# Altium PCB piRack.PcbDoc
Units mil, origin at the board's own origin, x right, y up, seen from the top; angles counter-clockwise.
Board outline 2559.06 x 2224.41 mil, 2 copper layers (Top Layer, Bottom Layer), stack 64.8 mil thick; 40 components, 64 nets, 236 pads, 120 vias.
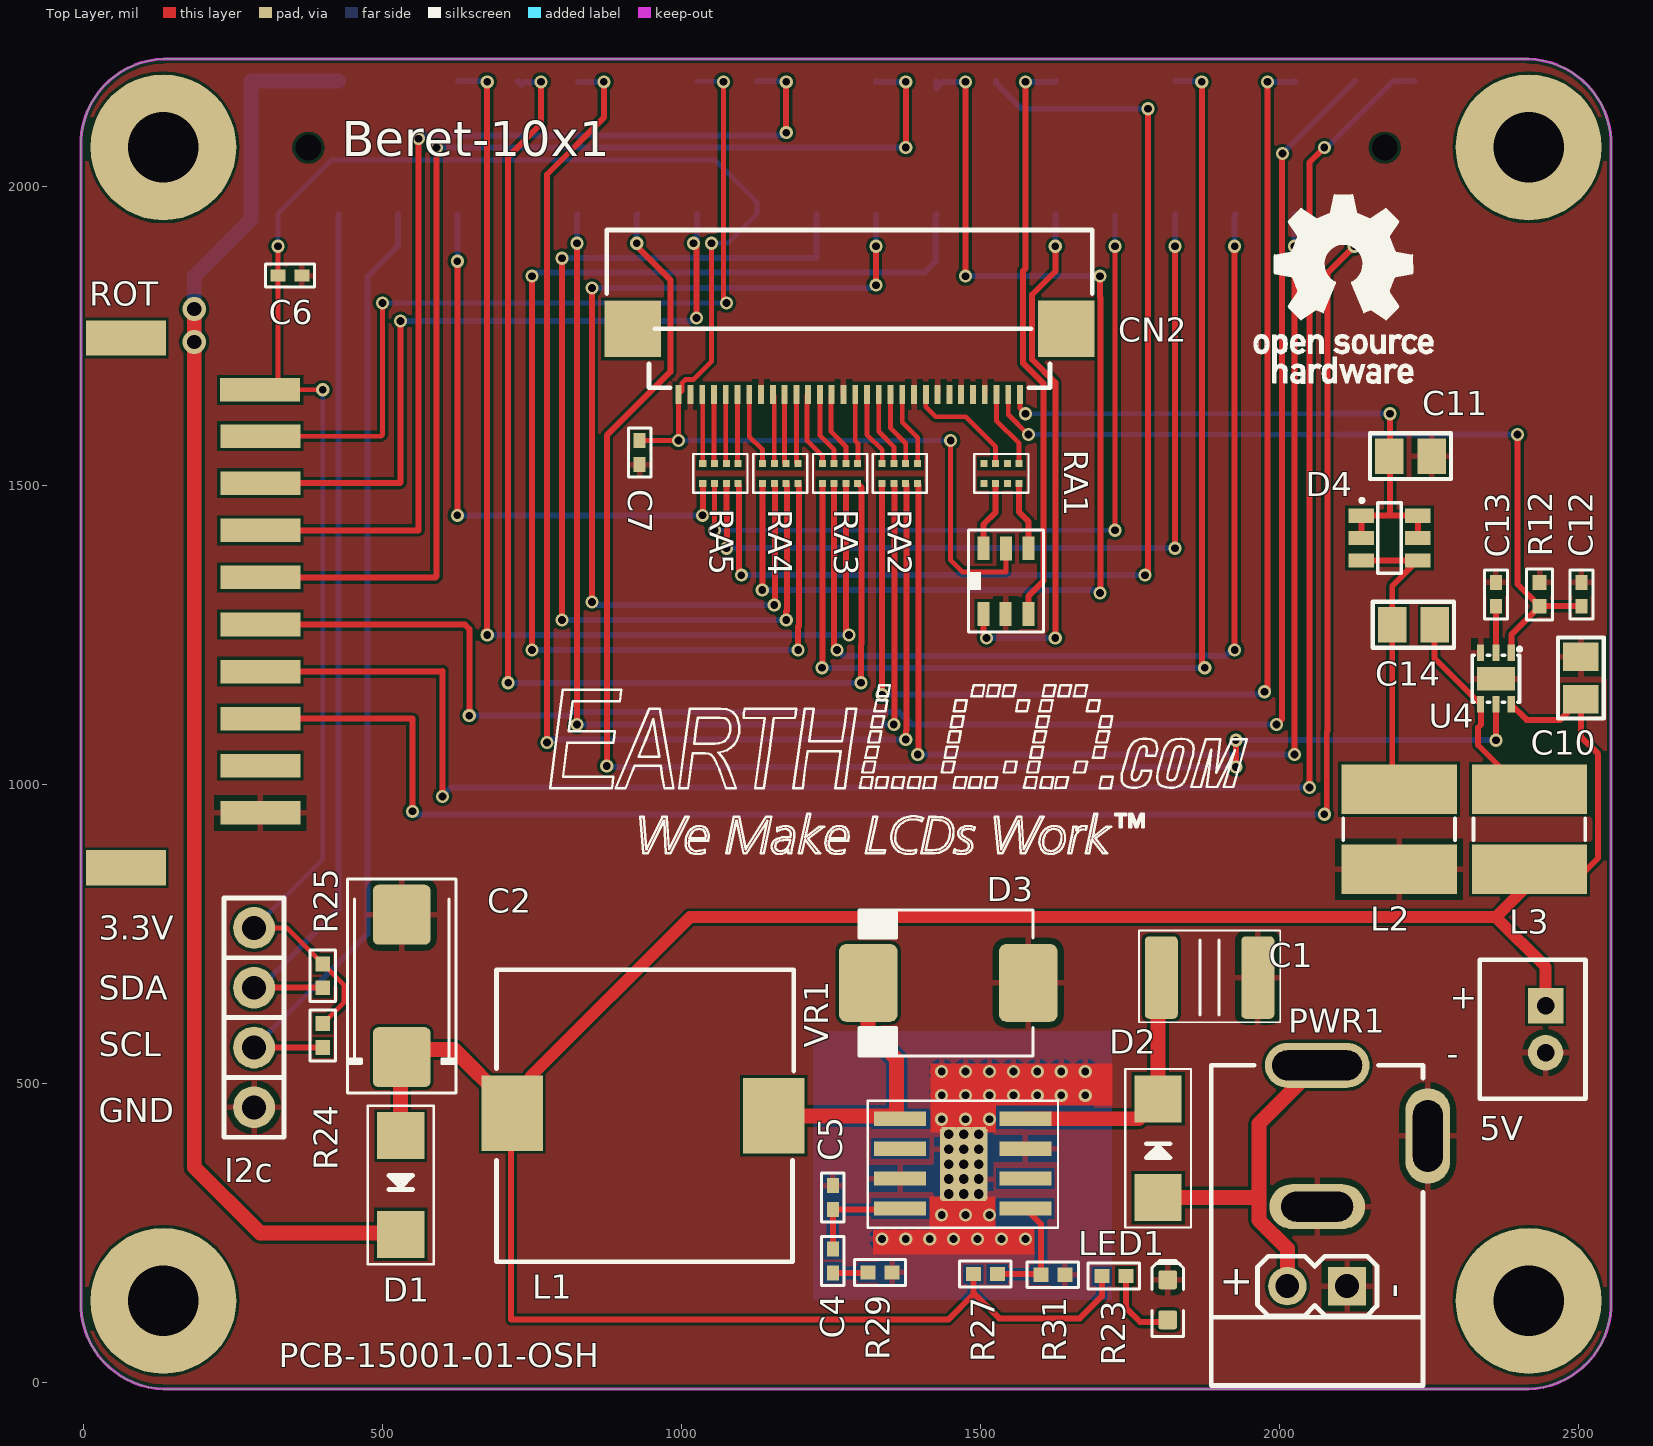
[diagram p0: Top Layer view]
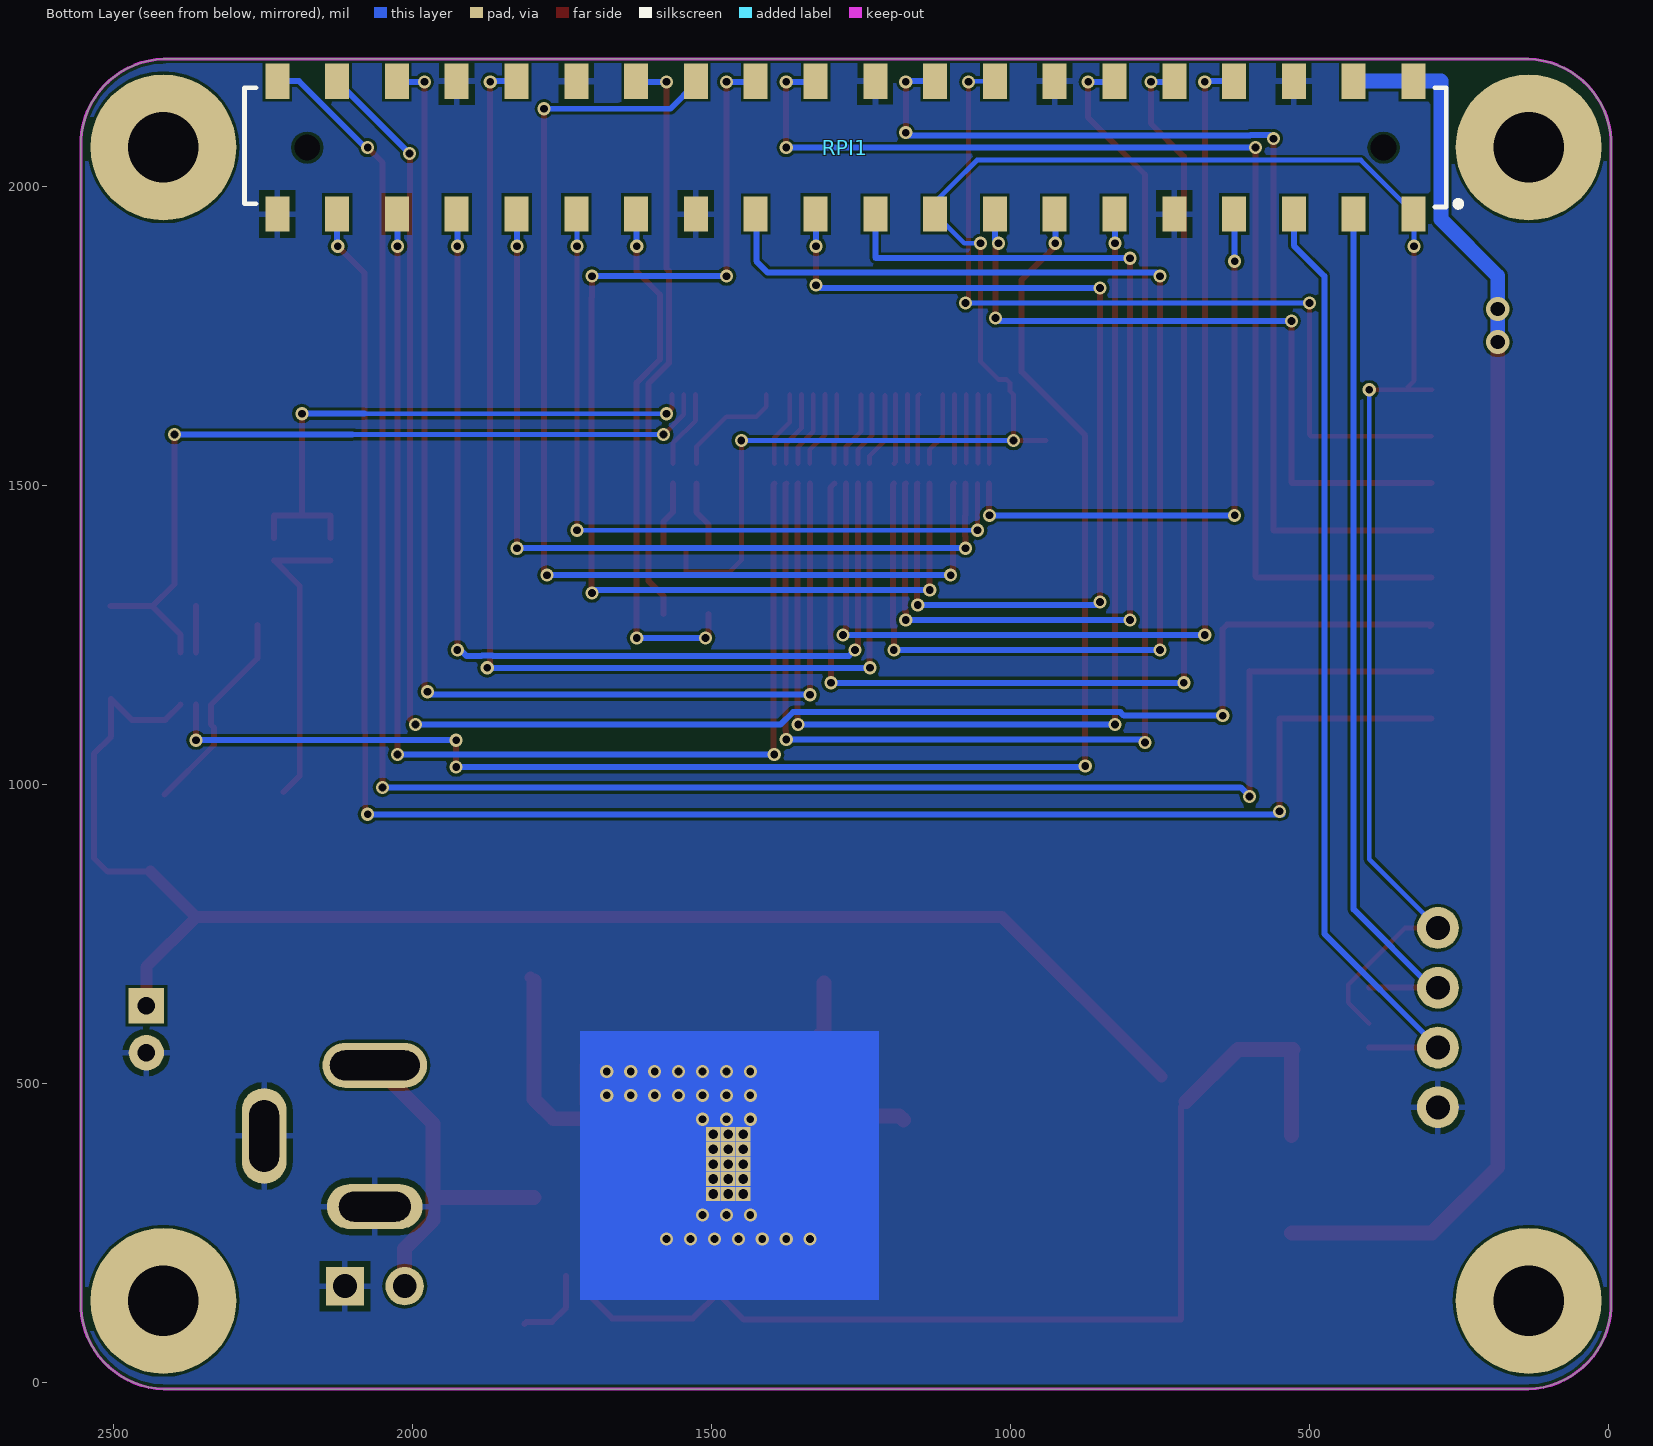
[diagram p1: Bottom Layer view, seen from below]
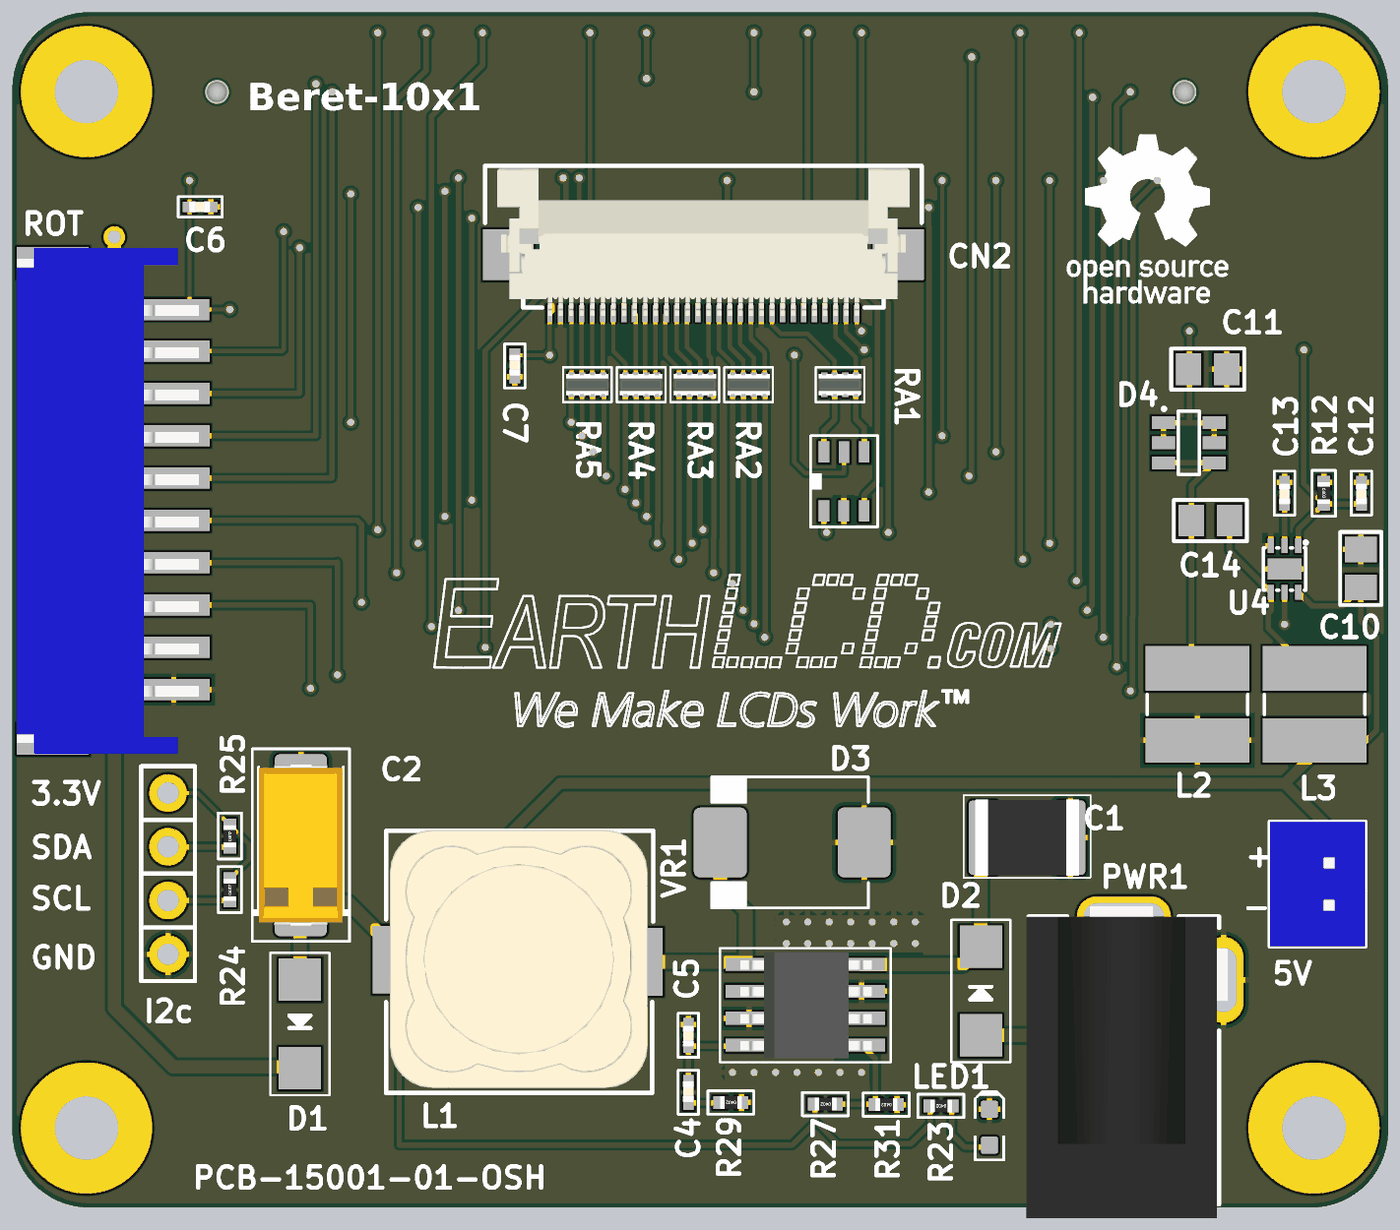
[diagram p2: 3D render of the assembled board from above, using the file's embedded part models]

## Layer stack, top to bottom
Top Solder: solder mask 0.4, Solder Resist, Dk 3.5
Top Layer: signal copper 1.4
Dielectric1: core 62, FR-4, Dk 4.8
Bottom Layer: signal copper 1.4
Bottom Solder: solder mask 0.4, Solder Resist, Dk 3.5

## Board outline
-4.53,136.43 -4.53,2065.57 cw(c138.19,2070.49) 133.27,2213.2 2416.73,2213.2 cw(c2411.81,2070.49) 2554.53,2065.57 2554.53,136.43 cw(c2411.81,131.51) 2416.73,-11.2 133.27,-11.2 cw(c138.19,131.51)

## Design rules (kind name [scope] priority, off if disabled: settings)
Clearance [All] p1: gap=5
ComponentClearance [All] p1: gap=10 collisioncheckmode=3 verticalgap=10 showdistances=TRUE
DiffPairsRouting DiffPair_DIFF100DiffPairsRouting [InDifferentialPairClass('DIFF100')] p1: maxlimit=10 minlimit=10 mostfreqgap=10 toplayer_minwidth=8 toplayer_maxwidth=8 toplayer_prefwidth=8 bottomlayer_minwidth=8 bottomlayer_maxwidth=8 bottomlayer_prefwidth=8 maxuncoupledlength=500
DiffPairsRouting [All] p2: maxlimit=10 minlimit=10 mostfreqgap=10 toplayer_minwidth=15 toplayer_maxwidth=15 toplayer_prefwidth=15 bottomlayer_minwidth=15 bottomlayer_maxwidth=15 bottomlayer_prefwidth=15 maxuncoupledlength=500
HoleSize [All] p1: absolutevalues=TRUE maxlimit=150 minlimit=1 maxpercent=80.000 minpercent=20.000
HoleToHoleClearance [All] p1: gap=6 allowstackedmicrovias=TRUE
MatchedLengths DiffPair_DIFF100MatchedLengths [InDifferentialPairClass('DIFF100')] p1: tolerance=10 checknetsindiffpair=TRUE checkdiffpairvsdiffpair=TRUE checkothers=TRUE
MinimumSolderMaskSliver [All] p1: minsoldermaskwidth=5
PolygonConnect [All] p1: connectstyle=Relief reliefconductorwidth=10 reliefentries=4 polygonreliefangle="90 Angle" airgapwidth=10
RoutingVias [All] p1: holewidth=13 width=22 viastyle="Through Hole" minholewidth=13 minwidth=22 maxholewidth=13 maxwidth=22
SilkToSolderMaskClearance SilkscreenOverComponentPads [IsPad] p1: minsilkscreentomaskgap=5 clearancetoexposedcopper=TRUE
SolderMaskExpansion [All] p1: expansion=4
Width [All] p1: maxlimit=50 minlimit=6 preferedwidth=8
24 further rules are at their usual default settings.

## Classes and differential pairs
differential pair class DIFF100: LACK LAX0 LAX1 LAX2

## Components (designator, comment, footprint, x,y, rotation, side; value= is the part's Value field where it differs from the comment)
5V "2-Pin-JST-2mm" 2-pin-JST-2mm 2445,630 r180 top
C1 "approved sub OK" CAPC4532X280N 1883,677 r0 top
C2 "100µ" CAPMP7343X310N 532,663 r90 top
C4 "15nf" 0402C 1253,223 r270 top
C5 "120pf" 0402C 1253,289 r90 top
C6 ".01uf" 0402C 325,1851 r0 top
C7 ".01uf" 0402C 930,1575 r270 top
C10 "4u7 / 25V" C0805 2504,1178 r90 top
C11 "4u7 / 25V" C0805 2219,1549 r180 top
C12 "0.1u" 0402c 2505,1298 r90 top
C13 "0.22u" 0402c 2362,1298 r90 top
C14 "1uf / 25V" C0805 2224,1267 r180 top
CN2 "FLEX_30 0.5mm" FH12A-30S-0.5H(55) 1183,1762 r180 top
D1 "RB050L40" SOD-106 530.3,247.58 r90 top
D2 "RB050L40" SOD-106 1797,474 r270 top
D3 "DIODE_SCHOTTKY_30BQ100TRPBF" DO-214AB 1446,668 r180 top
D4 "ZHCS2000TA" SOT23-6#1 2184,1412 r0 top
I2c "ValueValueAux" JMP1X4-F180_2.54 285,610 r270 top
L1 "33uh" SLF6025 1154,446 r180 top
L2 "10u" IND-NR6045 2418,925 r90 top
L3 "10u" IND-NR6045 2200,925 r270 top
LED1 "Green" LED-0603-GREEN 1813,138 r90 top
PWR1 "POWER_JACKPTH_Combo" "POWER_JACK_PTH - Combo" 2059,-6.15 r0 top
R12 "100k" 0402r 2435,1338 r270 top
R23 "330ohm" 0402R 1742.9,177.7 r180 top
R24 "4.7k" 0402R 400,560 r90 top
R25 "4.7k" 0402R 400,660 r90 top
R27 "9.1k" 0402R 1528,181 r180 top
R29 "11k" 0402R 1352,184 r180 top
R31 "5.49k" 0402R 1641,180 r180 top
RA1 "YC/TC124" YC/TC124 1535,1520 r0 top
RA2 "YC/TC124" YC/TC124 1365,1520 r0 top
RA3 "YC/TC124" YC/TC124 1265,1520 r0 top
RA4 "YC/TC124" YC/TC124 1165,1520 r0 top
RA5 "YC/TC124" YC/TC124 1065,1520 r0 top
ROT "S10B-PH" PH-SM4 295,1660 r90 top
RPI1 "RaspberryPIB" SMTC-SSM-120-X-DV-BE-A 1276,2065 r0 bottom
U4 "TPS61165DRV" SON-6 2362,1177 r270 top
VR1 "A5974D" HSOP8 1470,363 r270 top
? "74LVC2G14" SOT23-6#2 1505,1290 r90 top

## Footprints (in the part's own frame and the unit in brackets; to place one, negate y for a bottom-side part, rotate by r counter-clockwise, add the part's x,y. Pads: shape width x height; smd on the part's side, far side on the other; paste and mask are expansions set on the pad)
2-pin-JST-2mm [mm]
  rect 1.5x1.5 hole 0.75: 1(0,0)
  round 1.5 hole 0.75: 2(0,2)
  silkscreen extent -1.7,-1.95 2.8,3.95, body extent -1.7,-1.95 2.8,3.95, height 6
0402C [mil]
  rect 25x20 smd: 1(0,0) 2(40,0)
  silkscreen extent -21,-19 61,19, body extent -1,-10 38,10, height 14
0402c [mil]
  rect 25x20 smd: 1(0,0) 2(40,0)
  silkscreen extent -21,-19 61,19, body extent -1,-10 38,10, height 14
0402r [mm]
  rect 0.635x0.6 smd: 1(0,0) 2(1.016,0)
  silkscreen extent -0.58,-0.55 1.6,0.55, body extent -0.02,-0.3 1.02,0.3, height 0.34
0402R [mm]
  rect 0.635x0.6 smd: 1(0,0) 2(1.016,0)
  silkscreen extent -0.58,-0.55 1.6,0.55, body extent -0.02,-0.3 1.02,0.3, height 0.34
C0805 [mm]
  rect 1.2x1.5 smd: 1(-0.9,0) 2(0.9,0)
  silkscreen extent -1.73,-0.98 1.73,0.98, body extent -1.05,-0.63 1.05,0.63, height 1.25
CAPC4532X280N [mm] "Chip Capacitor, Body 4.5x3.2mm, 1812, IPC Medium Density"
  rrect25% 1.4x3.5 smd: 1(-2.05,0) 2(2.05,0)
  silkscreen extent -3,-1.9 3,2, body extent -2.45,-1.8 2.45,1.8, height 2.79
CAPMP7343X310N [mm] "Molded body capacitor, Body 7.3x4.3mm, 2917, IPC Nominal settings"
  round 1 on Mech15: 0(0,0)
  rrect20% 2.55x2.45 smd: 1(-3.025,0) 2(3.025,0)
  silkscreen extent -4.55,-2.3 4.55,2.3, body extent -3.8,-1.97 3.8,1.98, height 3.1
DO-214AB [mm] "JEDEC DO214 variation AB. SMC"
  round 0.508 on Mech15: 0(0,0)
  rrect25% 2.5x3.3 smd: A(-3.4,0) K(3.4,0)
  silkscreen extent -3.6,-3.1 3.8,3.1, body extent -3.98,-2.98 4.05,2.98, height 2.62
FH12A-30S-0.5H(55) [mm]
  rect 0.25x0.8 smd: 1(4.772,2.787) 2(4.272,2.787) 3(3.772,2.787) 4(3.272,2.787) 5(2.772,2.787) 6(2.272,2.787) 7(1.772,2.787) 8(1.272,2.787) 9(0.772,2.787) 10(0.272,2.787) 11(-0.228,2.787) 12(-0.728,2.787) 13(-1.228,2.787) 14(-1.728,2.787) 15(-2.228,2.787) 16(-2.728,2.787) 17(-3.228,2.787) 18(-3.728,2.787) 19(-4.228,2.787) 20(-4.728,2.787) 21(-5.228,2.787) 22(-5.728,2.787) 23(-6.228,2.787) 24(-6.728,2.787) 25(-7.228,2.787) 26(-7.728,2.787) 27(-8.228,2.787) 28(-8.728,2.787) 29(-9.228,2.787) 30(-9.728,2.787)
  rect 2.4x2.4 smd: MT1(-11.7,0) MT2(6.731,0)
  silkscreen extent -12.8,-4.2 7.83,2.5, body extent -12.24,-4.1 7.26,2.9, height 2.05
HSOP8 [mil]
  rect 24x87 smd: 1(-77.87,-104.33) 2(-27.87,-104.33) 3(22.13,-104.33) 4(72.13,-104.33) 5(72.13,104.97) 6(22.13,104.97) 7(-27.87,104.97) 8(-77.87,104.97)
  rect 118.11x78.74 smd: 9(-1.97,1.97)
  rect 24x24 hole 16: 16(-52.07,27.06) 17(-27.07,27.06) 18(-2.07,27.06) 19(22.93,27.06) 20(47.93,27.06) 21(-52.07,2.06) 22(-27.07,2.06) 23(-2.07,2.06) 24(22.93,2.06) 25(47.93,2.06) 26(-52.07,-22.94) 27(-27.07,-22.94) 28(-2.07,-22.94) 29(22.93,-22.94) 30(47.93,-22.94)
  Bottom Layer region: -225,-249.99 225,-249.99 225,250.01 -225,250.01
  silkscreen extent -108,-158 104,159, body extent -100,-120 96,124, height 69
IND-NR6045 [mm] "SMT power inductor 5 x 5mm"
  rect 2.1x4.9 smd: 1(-1.7,0) 2(1.7,0)
  silkscreen extent -0.48,-2.37 0.48,2.37, body extent -2.65,-2.5 2.65,2.5, height 2
JMP1X4-F180_2.54 [mil]
  round 70 hole 40: 1(-150,0) 2(-50,0) 3(50,0) 4(150,0)
  silkscreen extent -200,-50 200,50, body extent -204,-54 204,54, height 169
LED-0603-GREEN [mm]
  rrect25% 0.8x0.8 smd: A(-0.85,0) K(0.85,0)
  silkscreen extent -1.55,-0.67 1.68,0.67
PH-SM4 [mm]
  rect 1x3.4 smd: 1(0,0) 2(-1.97,-0.016) 3(-3.97,-0.016) 4(-5.97,-0.016) 5(-7.97,-0.016) 6(-9.97,-0.016) 7(-11.97,-0.016) 8(-13.97,-0.016) 9(-15.97,-0.016) 10(-17.97,-0.016)
  rect 1.5x3.4 smd: 11(-20.3,5.7) 12(2.2,5.7)
  body extent -21,-1.2 2.9,7.4, height 5.6
"POWER_JACK_PTH - Combo" [mil] "Power jack and Connector Combined"
  rect 64x64 hole 40: 1(54,167)
  round 64 hole 40: 2(-46,167)
  oval 160x75 hole 50 slot 120 at 0 deg: GND(4,300.15)
  oval 75x160 hole 50 slot 120 at 90 deg: GNDBREAK(189.04,418.26)
  oval 175x75 hole 50 slot 150 at 0 deg: PWR(4,536.37)
  silkscreen extent -173,1 181,536, body extent -177,-25 197,556, height 433
SLF6025 [mm] "TDK Inductor"
  rect 2.6x3.2 smd: 1(0,0) 2(11.1,-0.1)
  silkscreen extent -0.85,-6.2 11.78,6.2, body extent -0.6,-6.22 11.6,5.97, height 6.3
SMTC-SSM-120-X-DV-BE-A [mm]
  rect 1.02x1.5 smd: 1(-24.13,2.822) 2(-24.13,-2.823) 3(-21.59,2.822) 4(-21.59,-2.823) 5(-19.05,2.822) 6(-19.05,-2.823) 7(-16.51,2.822) 8(-16.51,-2.823) 9(-13.97,2.822) 10(-13.97,-2.823) 11(-11.43,2.822) 12(-11.43,-2.823) 13(-8.89,2.822) 14(-8.89,-2.823) 15(-6.35,2.822) 16(-6.35,-2.823) 17(-3.81,2.822) 18(-3.81,-2.823) 19(-1.27,2.822) 20(-1.27,-2.823) 21(1.27,2.822) 22(1.27,-2.823) 23(3.81,2.822) 24(3.81,-2.823) 25(6.35,2.822) 26(6.35,-2.823) 27(8.89,2.822) 28(8.89,-2.823) 29(11.43,2.822) 30(11.43,-2.823) 31(13.97,2.822) 32(13.97,-2.823) 33(16.51,2.822) 34(16.51,-2.823) 35(19.05,2.822) 36(19.05,-2.823) 37(21.59,2.822) 38(21.59,-2.823) 39(24.13,2.822) 40(24.13,-2.823)
  round 0.8 hole 1.1: MH41(-22.86,0) MH42(22.86,0)
  silkscreen extent -26.16,-2.54 25.53,2.52, body extent -25.4,-3.52 25.4,3.52, height 7.42
SOD-106 [mm]
  rect 2x2 smd: A(4.191,0) K(0,0)
  silkscreen extent -1.27,-1.4 5.46,1.4, body extent -0.52,-1.35 4.77,1.35, height 2.23
SON-6 [mm]
  rect 0.7x0.3 smd: 1(-1.1,0.65) 2(-1.1,0) 3(-1.1,-0.65) 4(1.1,-0.65) 5(1.1,0) 6(1.1,0.65)
  rect 1x1.6 smd: 7(0,0)
  silkscreen extent -1.33,-1 1,1.08, body extent -1.02,-1 1.02,1, height 0.76
SOT23-6#1 [mm]
  rect 1.1x0.6 smd: 1(-1.2,0.95) 2(-1.2,0) 3(-1.2,-0.95) 4(1.2,-0.95) 5(1.2,0) 6(1.2,0.95)
  silkscreen extent -1.25,-1.5 0.5,1.68, body extent -1.56,-1.5 1.56,1.5, height 1.46
SOT23-6#2 [mm]
  rect 1.016x0.508 smd: 1(-0.127,0) 2(-0.127,-0.94) 3(-0.127,-1.905) 4(2.667,-1.905) 5(2.652,-0.95) 6(2.667,0)
  silkscreen extent -0.89,-2.54 3.43,0.64, body extent 0.05,-2.41 2.49,0.51, height 1.33
YC/TC124 [mm] "Yaego YC/TC124"
  rect 0.3x0.3 smd: 1(-0.75,-0.425) 2(-0.25,-0.425) 3(0.25,-0.425) 4(0.75,-0.425) 5(0.75,0.425) 6(0.25,0.425) 7(-0.25,0.425) 8(-0.75,0.425)
  silkscreen extent -1.15,-0.82 1.15,0.82, body extent -1,-0.5 1,0.5, height 0.35

## Part data
C1: library part CAPC_22u_1812_25V, "TDK C4532X5R1H685M"
C2: library part CAPT_330u_2917_6V3, "TPSC107M006R0150"
C4 C5 C6 C7: library part C-USC0402
C10 C11 C14: library part C-EUC0805
C12 C13: library part C-EUC0603
D1 D2: "Schottky Diode SOD106"
D3: "Diode Schottky SMD 100V 3A SMC"
I2c: library part JMP4, "=Description"
L1: library part ELLCTV470M
L2 L3: library part Inductor
LED1: library part LED_SMD_Green_0603_570nm, "LED 0603 SMD Green 570nm 50mcd 20mA"
PWR1: "Dual footprint for Jack and Jumper power"
R12: library part RES_0402_2512, "Resistor 0402-2512"
R23 R24 R25 R27 R29 R31: library part R-US_R0402
RA1 RA2 RA3 RA4 RA5: "Yaego YC/TC124 Resistor Array"

## Free pads (board coordinates)
  round 244.09 hole 118.11: 1(133.27,136.43) 2(2416.73,136.43) 3(2416.73,2065.57) 4(133.27,2065.57)

## Via types
v1: diameter 22, hole 13, Top Layer to Bottom Layer, tented both sides, 118 vias
v2: diameter 40, hole 24, Top Layer to Bottom Layer, 2 vias

## Nets (pads, with @x,y where several pads share a name; then routed paths per layer and width w, separated by ;. In a path a pad name is that pad's centre, name@x,y a point inside that pad or via, vN(x,y) a via of type N, cw(c..) or ccw(c..) an arc to the next point about the centre after c; other vN are vias at no path point)
3V3: ?.5 C6.1 C7.1 CN2.1 I2c.1 R24.2 R25.2 ROT.1 RPI1.1 RPI1.17 | length 3809.4
  Top Layer w8: I2c.1 340,760 R25.2 435,665 435,635 R24.2 ; ROT.1 v1(400,1660) ; v1(325,1900) C6.1 325,1675 ROT.1@335,1665 ; 940,1575 v1(995,1575) 995,1652.13 CN2.1 1000.91,1658.03 1000.91,1671.74 1006.18,1677.02 1019.89,1677.02 1050,1707.13 v1(1050,1905) ; v1(1450,1575) 1450,1375 1469.6,1355.4 1542.4,1355.4 ?.5
  Bottom Layer w8: I2c.1 400,875 v1(400,1660) ; v1(325,1900) 325,1952.88 RPI1.1 326,1956.12 413.96,2044.08 1055.92,2044.08 1096.92,2003.08 1096.92,2002.96 1113.96,1985.92 1114.08,1985.92 1126,1974 RPI1.17 1077.12,1905 v1(1050,1905) ; v1(995,1575) v1(1450,1575)
5V: 5V.1 C2.1 C10.1 D1.A L1.2 L2.1 R23.2 R27.2 U4.6 | length 4369.3
  Top Layer w10: L1.2@706.03,469.97 715,461 715,105 1446,105 1488,147 1488,150 ; R27.2 1488,150 ; R23.2 1702.9,143.9 1666,107 1531,107 1488,150 ; U4.6 2413.28,1108 2469.43,1108 C10.1 2504,1080 2533,1051 2533,877 2510.07,854.07 L2.1@2438,854.07
  Top Layer w20: L1.2@747.2,511.14 1014.05,778 2361.93,778 ; L2.1@2438,854.07 2361.93,778 ; 5V.1 2445,694.93 2361.93,778
  Top Layer w25: C2.1@527.35,556.64 619.36,556.64 L1.2@706.03,469.97 ; D1.A C2.1@530.3,553.69
B3: CN2.3 RA5.8 | length 114.6
  Top Layer w8: RA5.8 CN2.3@1035.47,1651.31
B3-OUT: RA5.1 RPI1.7 | length 966.3
  Top Layer w10: v1(625,1450) v1(625,1875) ; v1(1035,1450) 1035.47,1450.47 RA5.1
  Bottom Layer w10: v1(625,1450) v1(1035,1450) ; v1(625,1875) RPI1.7@625,1952.88
B4: CN2.4 RA5.7 | length 114.6
  Top Layer w8: RA5.7@1054.2,1537.69 CN2.4
B4-OUT: RA5.2 RPI1.29 | length 1276.2
  Top Layer w8: v1(1055,1425) 1055.16,1425.16 RA5.2 ; v1(1725,1425) v1(1725,1900)
  Bottom Layer w8: v1(1055,1425) v1(1725,1425) ; v1(1725,1900) RPI1.29@1725,1952.88
B5: CN2.5 RA5.6 | length 114.6
  Top Layer w8: RA5.6@1073.88,1537.69 CN2.5
B5-OUT: RA5.3 RPI1.31 | length 1418.5
  Top Layer w10: RA5.3 1074.84,1450.16 1076,1449 1076,1415.3 1075,1414.3 v1(1075,1395) ; v1(1825,1395) v1(1825,1900)
  Bottom Layer w10: v1(1075,1395) v1(1825,1395) ; v1(1825,1900) 1825,1952.88 RPI1.31
B6: CN2.6 RA5.5 | length 114.6
  Top Layer w8: RA5.5@1093.57,1537.69 CN2.6
B6-OUT: RA5.4 RPI1.26 | length 1887.9
  Top Layer w10: RA5.4 1096,1501.8 1096,1354 v1(1100,1350) ; v1(1775,1350) 1780,1355 v1(1780,2130)
  Bottom Layer w10: v1(1100,1350) v1(1775,1350) ; RPI1.26 1526,2172.46 1568.46,2130 v1(1780,2130)
B7: CN2.7 RA4.8 | length 124.7
  Top Layer w8: CN2.7 1113.25,1581.75 1135.47,1559.53 RA4.8
B7-OUT: RA4.1 RPI1.24 | length 1891.9
  Top Layer w10: v1(1135,1325) 1135.47,1325.47 RA4.1 ; v1(1475,1850) v1(1475,2175) ; v1(1700,1320) 1700.87,1320.87 1700.87,1814.26 1700,1815.13 v1(1700,1850)
  Bottom Layer w10: v1(1135,1325) 1695,1325 v1(1700,1320) ; RPI1.24 1426,2164 1437,2175 v1(1475,2175) ; v1(1475,1850) v1(1700,1850)
COMP: C13.1 U4.2 | length 77.7
  Top Layer w10: U4.2 C13.1
DE: CN2.28 RA1.5 | length 131.2
  Top Layer w8: CN2.28 1526.64,1608.36 1564.53,1570.47 RA1.5
DE-OUT: ?.3 RPI1.28 | length 967.2
  Top Layer w10: v1(1575,2175) 1575,1862.69 1571.39,1859.07 1571.39,1704.4 1605,1670.79 1605,1340 1580,1315 ?.3
  Bottom Layer w10: v1(1575,2175) 1624.88,2175 RPI1.28
EXT_PWR: C1.1 D2.K VR1.8 | length 440.9
  Top Layer w20: C1.1@1797,671.71 C1.1
  Top Layer w25: VR1.8 1763.87,440.87 D2.K C1.1@1797,671.71
G2: CN2.9 RA4.7 | length 116.6
  Top Layer w8: CN2.9 1155.16,1649.73 RA4.7
G2-OUT: RA4.2 RPI1.21 | length 1631.1
  Top Layer w10: v1(850,1305) v1(850,1830) ; v1(1155,1300) 1156,1301 1156,1502.43 RA4.2 ; v1(1325,1835) v1(1325,1900)
  Bottom Layer w10: v1(850,1305) 855,1300 v1(1155,1300) ; v1(850,1830) 1320,1830 v1(1325,1835) ; v1(1325,1900) RPI1.21@1325,1952.88
G3: CN2.10 RA4.6 | length 113
  Top Layer w8: RA4.6@1172.31,1539.27 CN2.10
G3-OUT: RA4.3 RPI1.19 | length 1708.5
  Top Layer w10: v1(800,1275) v1(800,1880) ; RA4.3 1176,1502.11 1176,1290.14 1175,1289.14 v1(1175,1275)
  Bottom Layer w10: v1(800,1275) v1(1175,1275) ; v1(800,1880) 1225,1880 1226,1881 RPI1.19
G4: CN2.11 RA4.5 | length 116.6
  Top Layer w8: CN2.11 1191.99,1539.27 RA4.5
G4-OUT: RA4.4 RPI1.23 | length 2113.9
  Top Layer w10: v1(750,1225) v1(750,1850) ; RA4.4 1196,1501.8 1196,1264.83 1195,1263.83 v1(1195,1225)
  Bottom Layer w10: v1(750,1225) v1(1195,1225) ; v1(750,1850) 756,1856 1406,1856 1425,1875 1425,1952.88 RPI1.23
G5: CN2.12 RA3.8 | length 124.4
  Top Layer w8: CN2.12@1210,1650.59 1210,1575 1235.47,1549.53 RA3.8
G5-OUT: RA3.1 RPI1.32 | length 1975.5
  Top Layer w10: v1(1235,1195) 1235.47,1200.47 RA3.1 ; v1(1870,2175) 1870,1200 v1(1875,1195)
  Bottom Layer w10: v1(1235,1195) v1(1875,1195) ; RPI1.32 1870,2176.12 v1(1870,2175)
G6: CN2.13 RA3.7 | length 125.4
  Top Layer w8: CN2.13 1231.36,1583.64 1255.16,1559.84 RA3.7
G6-OUT: RA3.2 RPI1.33 | length 1693.8
  Top Layer w10: RA3.2 1255.16,1225.16 1255,1225 v1(1260,1225) ; v1(1925,1225) v1(1925,1900)
  Bottom Layer w10: v1(1260,1225) 1270,1215 1865.3,1215 1866.3,1216 1883.7,1216 1884.7,1215 1910,1215 1925,1230 v1(1925,1225) ; v1(1925,1900) 1925,1952.88 RPI1.33
G7: CN2.14 RA3.6 | length 124.8
  Top Layer w8: CN2.14@1250,1651.22 1250,1590 1274.84,1565.16 RA3.6
G7-OUT: RA3.3 RPI1.8 | length 1841.9
  Top Layer w10: v1(675,1250) 670,1255 675,1260 v1(675,2175) ; RA3.3 1274.84,1250.16 1275,1250 v1(1280,1250)
  Bottom Layer w10: RPI1.8 673.88,2176.12 v1(675,2175) ; v1(675,1250) v1(1280,1250)
GND: 5V.2 ?.2 C1.2 C2.2 C5.2 C6.2 C7.2 C10.2 C11.1 C12.2 C13.2 CN2.2 CN2.8 CN2.15 CN2.21 CN2.23 CN2.25 CN2.27 D3.A I2c.4 L3.2 LED1.K PWR1.1 PWR1.GND PWR1.GNDBREAK R12.1 R29.1 R31.1 ROT.10 RPI1.6 RPI1.9 RPI1.14 RPI1.20 RPI1.25 RPI1.30 RPI1.34 RPI1.39 U4.3 U4.7 VR1.3 VR1.7 VR1.9 VR1.16 VR1.17 VR1.18 VR1.19 VR1.20 VR1.21 VR1.22 VR1.23 VR1.24 VR1.25 VR1.26 VR1.27 VR1.28 VR1.29 VR1.30 | length 41.2
  Bottom Layer w8: PWR1.GND 2077.95,279.05 2093.72,279.05 2093.77,279.1 PWR1.GND@2098.01,279.1
  other v1: 1335,240 1375,240 1415,240 1455,240 1495,240 1535,240 1575,240 1435,280 1475,280 1515,280 1435,440 1475,440 1515,440 1435,480 1475,480 1515,480 1555,480 1595,480 1635,480 1675,480 1435,520 1475,520 1515,520 1555,520 1595,520 1635,520 1675,520
GPIO2: I2c.2 R25.1 RPI1.3 | length 1473.1
  Top Layer w10: I2c.2 R25.1
  Bottom Layer w10: I2c.2 295,660 426,791 RPI1.3
GPIO3: I2c.3 R24.1 RPI1.5 | length 1608.7
  Top Layer w10: I2c.3 R24.1
  Bottom Layer w10: I2c.3 475,750 475,1850 526,1901 RPI1.5
GPIO20: ROT.6 RPI1.38 | length 2992.7
  Top Layer w10: ROT.6@298.11,1265 ROT.6 637.52,1267.48 645,1260 v1(645,1115) ; v1(1995,1100) 2004,1109 2004,2054 v1(2005,2055)
  Bottom Layer w10: v1(645,1115) 810.3,1115 816.3,1121 1363.7,1121 1384.7,1100 v1(1995,1100) ; v1(2005,2055) 2004.88,2055 RPI1.38
GPIO21: ROT.7 RPI1.40 | length 3250.3
  Top Layer w10: ROT.7 598.74,1188.74 600,1190 v1(600,980) v1@598.74,978.74 ; v1(2050,995) 2050,2040 v1(2075,2065)
  Bottom Layer w10: v1(600,980) 615,995 v1(2050,995) ; v1(2075,2065) 2078.63,2065 2189.75,2176.12 RPI1.40
GPIO22: ROT.3 RPI1.15 | length 1180.4
  Top Layer w10: ROT.3 528.7,1503.7 530,1505 v1(530,1775) ; v1(1020,1905) 1025,1900 v1(1025,1780)
  Bottom Layer w10: v1(530,1775) 1020,1775 v1(1025,1780) ; v1(1020,1905) 1026,1911 RPI1.15
GPIO23: ROT.2 RPI1.16 | length 1417.6
  Top Layer w8: ROT.2 497.44,1582.44 500,1585 v1(500,1805) ; v1(1070,2175) 1070,1810 v1(1075,1805)
  Bottom Layer w8: v1(500,1805) v1(1075,1805) ; RPI1.16 1070,2176.12 v1(1070,2175)
GPIO24: ROT.4 RPI1.18 | length 1673.8
  Top Layer w10: ROT.4 559.92,1424.96 559.96,1425 v1(560,2080) ; v1(1175,2090) v1(1175,2175)
  Bottom Layer w10: v1(560,2080) 566,2086 598.7,2086 599.7,2085 1170,2085 v1(1175,2090) ; RPI1.18 1173.88,2176.12 v1(1175,2175)
GPIO25: ROT.5 RPI1.22 | length 1958.9
  Top Layer w10: ROT.5 588.78,1346.22 590,1347.44 v1(590,2065) ; v1(1375,2065) v1(1375,2175)
  Bottom Layer w10: v1(590,2065) v1(1375,2065) ; RPI1.22 1325,2175.12 1325.12,2175 v1(1375,2175)
GPIO26: ROT.8 RPI1.37 | length 2971.4
  Top Layer w10: ROT.8 550,1110 v1(550,955) ; v1(2075,950) 2079,954 2079,1088.7 2080,1089.7 2080,1855 v1(2125,1900)
  Bottom Layer w10: v1(550,955) 545,950 v1(2075,950) ; v1(2125,1900) 2126,1901 RPI1.37
GPIO27: RPI1.13 U4.5 | length 2587
  Top Layer w10: v1(875,1031) 875,1583.86 981.14,1690 981.14,1843.86 925,1900 v1(925,1905) ; v1(1927,1029) 1927,1076 v1(1927,1074) ; v1(2362,1074) U4.5
  Bottom Layer w10: v1(875,1031) 877,1029 v1(1927,1029) ; v1(925,1905) 925,1952.88 RPI1.13 ; v1(1927,1074) v1(2362,1074)
LED_A: C11.2 CN2.30 D4.1 D4.2 D4.5 D4.6 | length 986.5
  Top Layer w8: CN2.30 1566.01,1628.99 v1(1575,1620)
  Top Layer w10: D4.2 D4.1 2185,1449.4 ; v1@2184.57,1619.57 v1(2185,1620) 2185,1449.4 ; D4.5 D4.6 2185,1449.4
  Bottom Layer w8: v1(1575,1620) 2080,1620
  Bottom Layer w10: 2080,1620 v1(2185,1620)
LED_C: C12.1 CN2.29 R12.2 U4.1 | length 1368.9
  Top Layer w8: CN2.29 1546.32,1618.68 v1(1580,1585)
  Top Layer w10: U4.1 2387.59,1250.59 R12.2 ; v1(2398,1585) 2398,1335 R12.2 ; C12.1 R12.2
  Bottom Layer w8: v1(1580,1585) 2100,1585
  Bottom Layer w10: 2100,1585 v1(2398,1585)
Net_4: ?.4 RA1.4 | length 114.7
  Top Layer w10: RA1.4 1564.53,1455.47 1580,1440 ?.4
Net_6: ?.6 RA1.2 | length 116.6
  Top Layer w10: ?.6 1505,1435 1525.16,1455.16 RA1.2
NetC4_1: C4.1 C5.1 VR1.4 | length 179.7
  Top Layer w10: C4.1 C5.1@1253,288.75 ; C5.1 C5.1@1253,288.75 ; VR1.4@1366.67,288.87 1253.13,288.87 C5.1@1253,288.75
NetC4_2: C4.2 R29.2 | length 58
  Top Layer w10: C4.2 R29.2@1311,183
NetC14_2: C14.2 D4.3 D4.4 L3.1 | length 511.2
  Top Layer w10: D4.3 D4.4 2188.56,1331.91 C14.2 2188.56,1014.37 L3.1@2216,986.93
NetD1_K: D1.K RPI1.2 RPI1.4 | length 2449.8
  Top Layer w20: D1.K D1.K@530.3,250
  Top Layer w25: v2(185,1795) 185,360 295,250 D1.K@530.3,250
  Bottom Layer w25: v2(185,1740) 185,1850 280,1945 280,2176.12 RPI1.2 RPI1.4
NetD2_A: D2.A PWR1.2 PWR1.PWR | length 598.3
  Top Layer w25: D2.A 1964.5,309 1965.5,310 ; PWR1.2 2013,223.72 1965.5,271.22 1965.5,310 ; PWR1.PWR 1965.5,432.72 1965.5,310
NetD3_K: D3.K L1.1 VR1.1 | length 415.9
  Top Layer w25: L1.1@1179,439 1185.76,445.76 1359.79,445.76 1359.79,540.21 1319,581 ; 1312.14,587.86 D3.K
NetLED1_A: LED1.A R23.1 | length 133.7
  Top Layer w10: R23.1 1742.9,125.1 1767,101 1809.76,101 LED1.A@1812.78,97.98
NetR27_1: R27.1 R31.2 VR1.5 | length 195.1
  Top Layer w10: R27.1 1600,181 R31.2 1601,264.84 VR1.5
PCLK: CN2.22 RA1.7 | length 193.1
  Top Layer w8: CN2.22 1408.53,1631.47 1425,1615 1475,1615 1525.16,1564.84 RA1.7
PCLK-OUT: ?.1 RPI1.27 | length 901.3
  Top Layer w10: ?.1 1505,1245 v1(1510,1245) ; v1(1625,1245) 1625,1672 1586.39,1710.61 1586.39,1819.24 1625,1857.86 v1(1625,1900)
  Bottom Layer w10: v1(1510,1245) v1(1625,1245) ; v1(1625,1900) 1625,1952.88 RPI1.27
R3: CN2.16 RA3.5 | length 117.6
  Top Layer w8: CN2.16 1290.42,1574.58 1295,1570 1295,1537.2 RA3.5
R3-OUT: RA3.4 RPI1.10 | length 1997.8
  Top Layer w10: v1(710,1170) 710,2050 765,2105 v1(765,2175) ; RA3.4 1301,1496.8 1301,1234.83 1300,1233.83 v1(1300,1170)
  Bottom Layer w10: v1(710,1170) v1(1300,1170) ; RPI1.10 732.12,2170 737.12,2175 v1(765,2175)
R4: CN2.17 RA2.8 | length 126.1
  Top Layer w8: CN2.17 1310,1652.17 1310,1585 1335.47,1559.53 RA2.8
R4-OUT: RA2.1 RPI1.36 | length 2066.3
  Top Layer w10: v1(1335,1150) 1335.47,1150.47 RA2.1 ; v1(1975,1155) 1980,1160 v1(1980,2175)
  Bottom Layer w10: v1(1335,1150) 1970,1150 v1(1975,1155) ; v1(1980,2175) 2027.12,2175 RPI1.36
R5: CN2.18 RA2.7 | length 126
  Top Layer w8: CN2.18 1329.79,1590.21 1355.16,1564.84 RA2.7
R5-OUT: RA2.2 RPI1.11 | length 1788.3
  Top Layer w10: v1(825,1100) v1(825,1905) ; v1(1355,1100) 1356,1101 1356,1502.43 RA2.2
  Bottom Layer w10: v1(825,1100) v1(1355,1100) ; v1(825,1905) 825,1952.88 RPI1.11
R6: CN2.19 RA2.6 | length 126
  Top Layer w8: CN2.19 1349.47,1595.53 1374.84,1570.16 RA2.6
R6-OUT: RA2.3 RPI1.12 | length 2218.5
  Top Layer w10: v1(775,1070) 775,2020 870,2115 v1(870,2175) ; RA2.3 1376,1502.11 1376,1090.14 1375,1089.14 v1(1375,1075)
  Bottom Layer w10: v1(775,1070) 780,1075 v1(1375,1075) ; RPI1.12@827.12,2175 v1(870,2175)
R7: CN2.20 RA2.5 | length 126.4
  Top Layer w8: CN2.20 1369.16,1605.84 1395,1580 1395,1537.2 RA2.5
R7-OUT: RA2.4 RPI1.35 | length 1994.8
  Top Layer w10: RA2.4 1396,1501.8 1396,1054 1400,1050 v1(1395,1050) ; v1(2025,1050) v1(2025,1900)
  Bottom Layer w10: v1(1395,1050) v1(2025,1050) ; v1(2025,1900) 2025,1952.88 RPI1.35
SW: C14.1 L2.2 U4.4 | length 352.6
  Top Layer w10: C14.1 2259.43,1210.67 U4.4 2337,1133.1 2337,1100 2332,1095 2332,1066 L2.2@2415,983
pads on no net: C2.0 CN2.24 CN2.26 CN2.MT1 CN2.MT2 D3.0 RA1.1 RA1.3 RA1.6 RA1.8 ROT.9 ROT.11 ROT.12 RPI1.MH41 RPI1.MH42 VR1.2 VR1.6

## Polygon pours and split planes (outlines as drawn)
GND on Top Layer "Keep-Out Layer-No Net" (solid, remove dead copper, pour order 8): -5,-14 2555,-14 2555,2213 -4,2213
GND on Bottom Layer "Keep-Out Layer-No Net" (solid, remove dead copper, pour order 12): -4.53,-11.2 2554.53,-11.2 2554.53,2213.2 -4.53,2213.2 -4.53,-7.27 -3.54,-8.25

## Keep-outs
Keep-Out Layer:
  the board outline again, w5

## Other copper
Top Layer:
  rectangle net GND: 1511,214 1590,258
  rectangle net GND: 1320,214 1432,256
  rectangle net GND: 1415,214 1525,311
  rectangle net GND: 1526,463 1721,533
  rectangle net GND: 1416,418 1526,533

## Silkscreen, mask and mechanical layers (free items; w line width, h text height)
Top Overlay:
  drawing of 1761 lines, arcs and shapes, not listed
  text "Beret-10x1" at 432,2031 h100
  text "3.3V" at 25,740 h40
  text "SDA" at 25,640 h40
  text "+" at 2285,625 h40
  text "SCL" at 25,545 h40
  text "-" at 2280,530 h40
  text "GND" at 25,435 h40
  text "PCB-15001-01-OSH" at 326,25 h40
Mechanical 1:
  lines w1: 2012.96,504.83 cw(c2013.02,529.85) 2012.96,554.87 2113.04,554.87 cw(c2112.98,529.85) 2113.04,504.83 2012.96,504.83 ; 2027.96,268.83 cw(c2028.02,293.85) 2027.96,318.87 2098.04,318.87 cw(c2097.98,293.85) 2098.04,268.83 2027.96,268.83 ; 2222.98,376.81 ccw(c2248,376.87) 2273.02,376.81 2273.02,446.89 ccw(c2248,446.83) 2222.98,446.89 2222.98,376.81

## Text inside footprints (layer, text, board x,y; h text height)
PWR1: Top Overlay "-" at 2213,140.85 h50 r90; Top Overlay "+" at 1949,138.85 h50 r90